# EAGLE board segmentring4 (EAGLE 7.2.0)
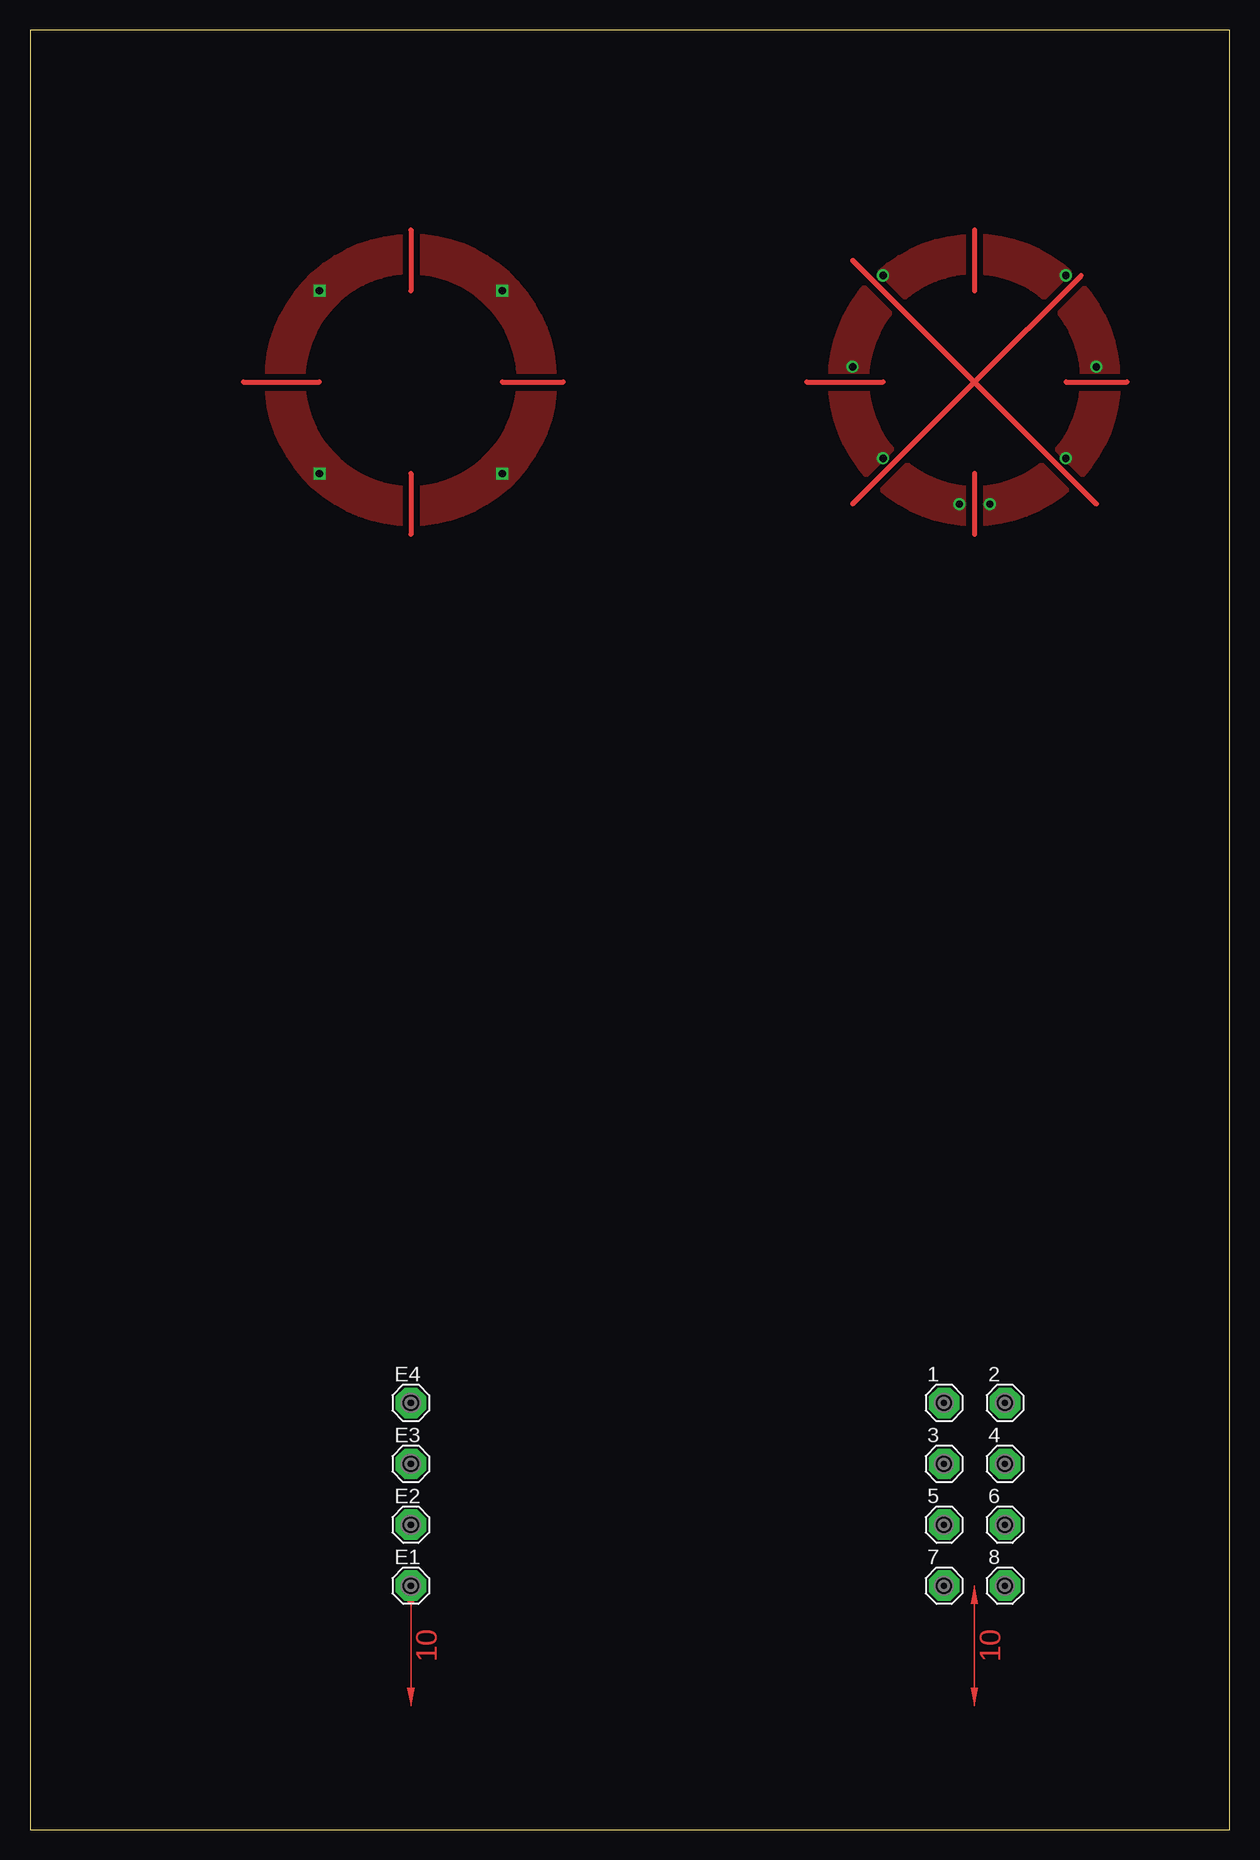
[diagram p0: board, top side]
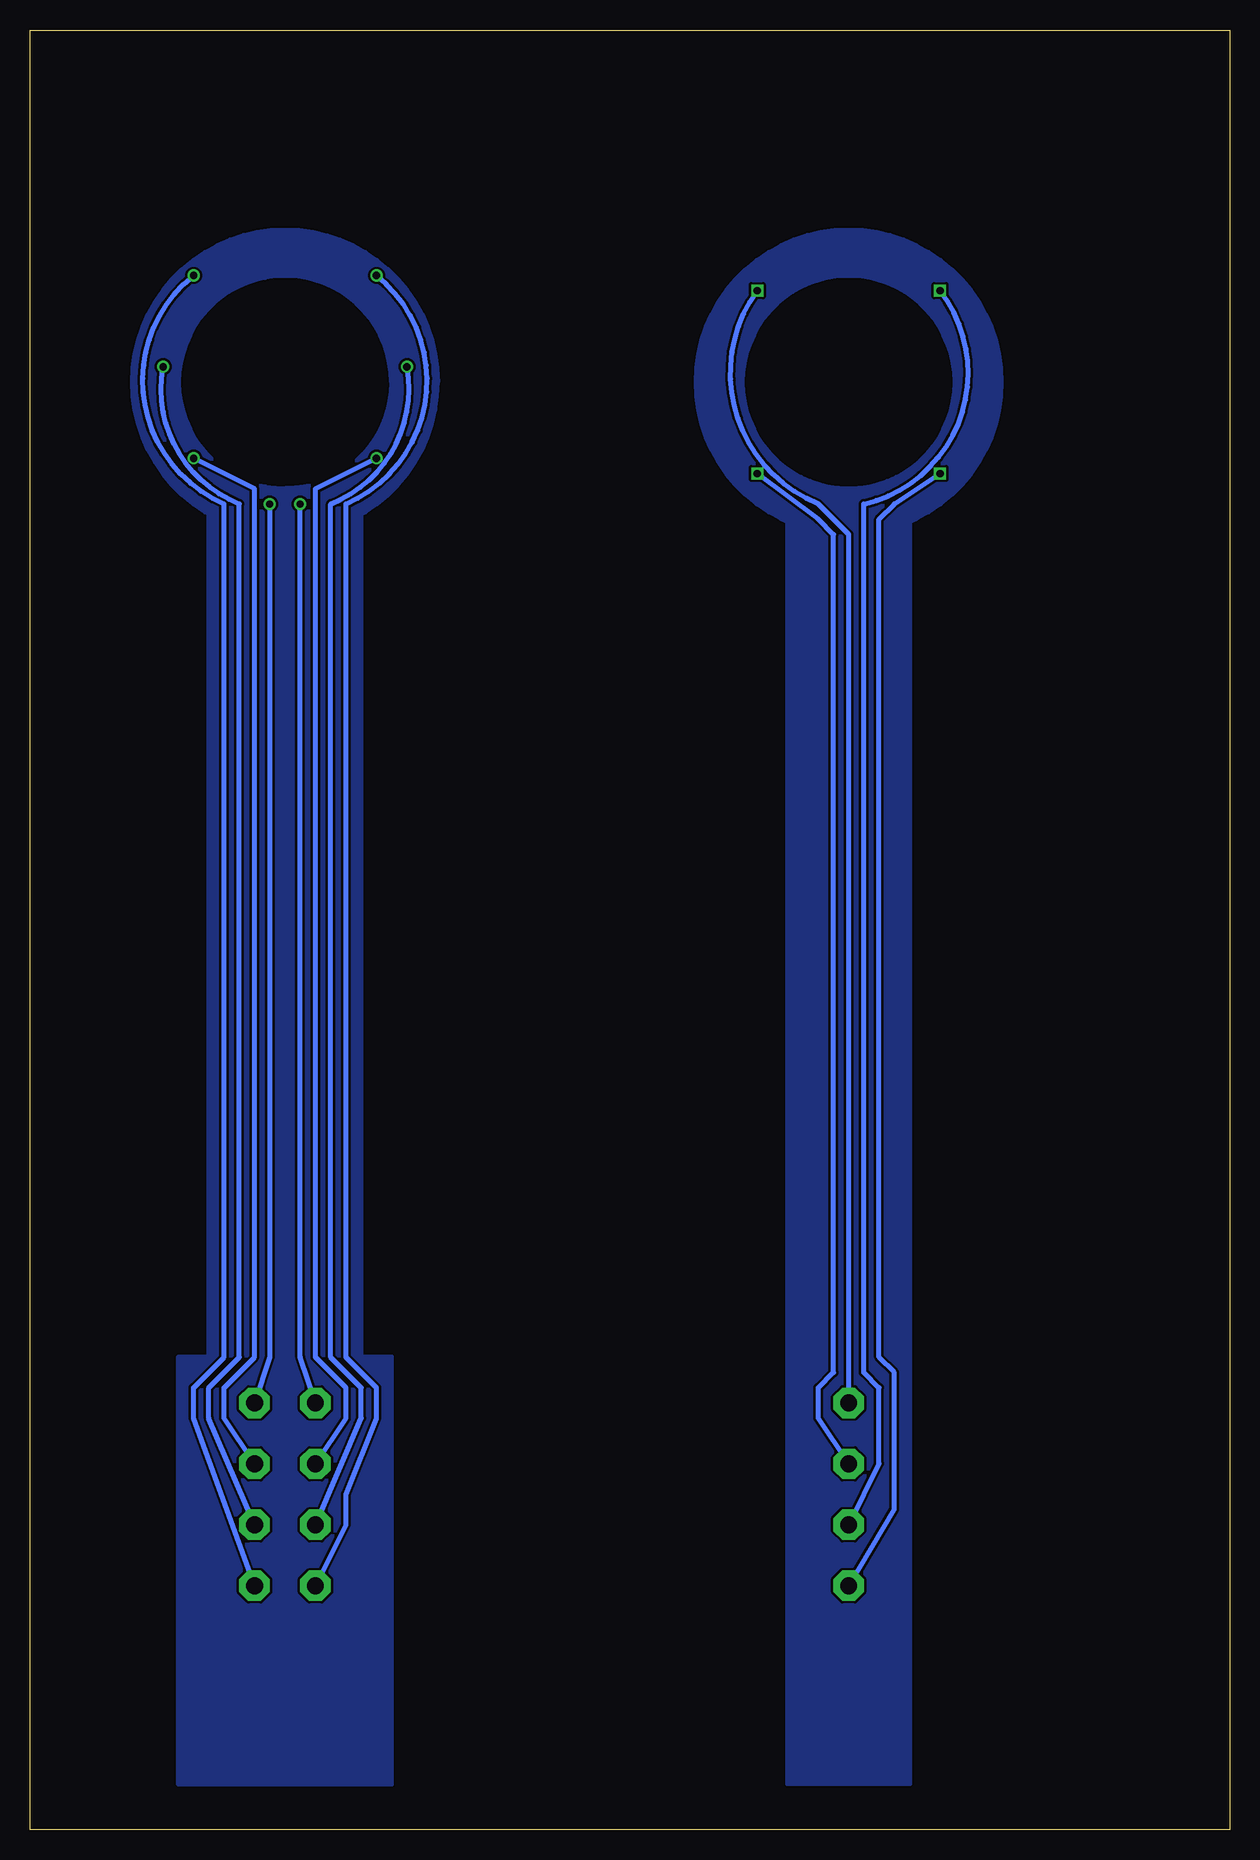
[diagram p1: board, bottom side, seen from below]

Size 100 x 150 mm. Coordinates in mm from the lower left corner, seen from the top.
Outline: 0,0 100,0 100,150 0,150 0,0
Copper layers (1*16): Top 0.035mm / dielectric 1.5mm / Bottom 0.035mm
Design rules "default": minimum track width 10mil, minimum drill 24mil, track to track 8mil, track to pad 8mil, pad to pad 8mil, via to via 8mil, smd to smd 8mil, copper to edge 40mil, drill to drill 8mil, minimum pad ring 10mil, minimum via ring 8mil, stop-mask expansion 4mil, vias tented up to drill 0mil, thermal gap 10mil

## Footprints (pad centres in the part's own frame; a part is rotated, then mirrored left to right if it is on the bottom)
SE14 = drill 1.397 pad 2.54 octagon: MP 0,0

## Placement (x,y rotation side)
1  SE14  [SE14]  76.2,35.56 0 top
2  SE14  [SE14]  81.28,35.56 0 top
3  SE14  [SE14]  76.2,30.48 0 top
4  SE14  [SE14]  81.28,30.48 0 top
5  SE14  [SE14]  76.2,25.4 0 top
6  SE14  [SE14]  81.28,25.4 0 top
7  SE14  [SE14]  76.2,20.32 0 top
8  SE14  [SE14]  81.28,20.32 0 top
E1  SE14  [SE14]  31.75,20.32 0 top
E2  SE14  [SE14]  31.75,25.4 0 top
E3  SE14  [SE14]  31.75,30.48 0 top
E4  SE14  [SE14]  31.75,35.56 0 top

## Library data of the parts
1-8 E1-E4 = solpad

## Nets
1: 1.MP
2: 2.MP
3: 3.MP
4: 4.MP
5: 5.MP
6: 6.MP
7: 7.MP
8: 8.MP
E1: E1.MP
E2: E2.MP
E3: E3.MP
E4: E4.MP

## Tracks (layer width: path | path; a pad name or v marks a point on that pad's centre or on a via)
1  (via drill 0.6)
  Bottom 0.406: 1.MP 77.47,39.37 v77.47,110.49
  pour Top (isolate 0.5): 69.74,120.82 arc90 78.74,111.82 78.74,108.82 arc-90 66.74,120.82
2  (via drill 0.6)
  Bottom 0.406: v80.01,110.49 80.01,39.37 2.MP
  pour Top (isolate 0.5): 78.74,111.82 arc90 87.74,120.82 90.74,120.82 arc-90 78.74,108.82
3  (via drill 0.6)
  Bottom 0.406: 3.MP 73.66,34.29 73.66,36.83 76.2,39.37 76.2,111.76 v71.12,114.3
  pour Top (isolate 0.5): 69.74,120.82 arc90 78.74,111.82 78.74,108.82 arc-90 66.74,120.82
4  (via drill 0.6)
  Bottom 0.406: 4.MP 83.82,34.29 83.82,36.83 81.28,39.37 81.28,111.76 v86.36,114.3
  pour Top (isolate 0.5): 78.74,111.82 arc90 87.74,120.82 90.74,120.82 arc-90 78.74,108.82
5  (via drill 0.6)
  Bottom 0.406: 5.MP 72.39,34.29 72.39,36.83 74.93,39.37 74.93,110.49 arc-79 v68.58,121.92
  pour Top (isolate 0.5): 78.74,129.82 arc90 69.74,120.82 66.74,120.82 arc-90 78.74,132.82
6  (via drill 0.6)
  Bottom 0.406: 6.MP 85.09,34.29 85.09,36.83 82.55,39.37 82.55,110.49 arc79 v88.9,121.92
  pour Top (isolate 0.5): 78.74,129.82 arc-90 87.74,120.82 90.74,120.82 arc90 78.74,132.82
7  (via drill 0.6)
  Bottom 0.406: 7.MP 73.66,25.4 73.66,27.94 71.12,34.29 71.12,36.83 73.66,39.37 73.66,110.49 arc-118 v71.12,129.54
  pour Top (isolate 0.5): 78.74,129.82 arc90 69.74,120.82 66.74,120.82 arc-90 78.74,132.82
8  (via drill 0.6)
  Bottom 0.406: 8.MP 86.36,34.29 86.36,36.83 83.82,39.37 83.82,110.49 arc118 v86.36,129.54
  pour Top (isolate 0.5): 78.74,129.82 arc-90 87.74,120.82 90.74,120.82 arc90 78.74,132.82
BULL
  Top 0.406: 64.77,120.65 71.12,120.65
E1  (via drill 0.6)
  Bottom 0.406: E1.MP 27.94,26.67 27.94,38.1 29.21,39.37 29.21,109.22 27.94,110.49 v24.13,113.03
  pour Top (isolate 0.5): 22.75,120.82 arc90 31.75,111.82 31.75,108.82 arc-90 19.75,120.82
E2  (via drill 0.6)
  Bottom 0.406: E2.MP 29.21,30.48 29.21,36.83 30.48,38.1 30.48,110.49 arc-115 v24.13,128.27
  pour Top (isolate 0.5): 31.75,129.82 arc90 22.75,120.82 19.75,120.82 arc-90 31.75,132.82
E3  (via drill 0.6)
  Bottom 0.406: E3.MP 34.29,34.29 34.29,36.83 33.02,38.1 33.02,107.95 34.29,109.22 v39.37,113.03
  pour Top (isolate 0.5): 31.75,111.82 arc90 40.75,120.82 43.75,120.82 arc-90 31.75,108.82
E4  (via drill 0.6)
  Bottom 0.406: E4.MP 31.75,107.95 34.29,110.49 arc104 v39.37,128.27
  pour Top (isolate 0.5): 31.75,129.82 arc-90 40.75,120.82 43.75,120.82 arc90 31.75,132.82
GND
  pour Bottom: 26.67,33.02 26.67,3.81 36.83,3.81 36.83,36.83 36.83,77.47 36.83,109.22 26.67,109.22
  pour Bottom: 31.75,111.76 arc-90 22.86,120.65 19.05,120.65 arc90 31.75,107.95
  pour Bottom: 22.86,120.65 arc-90 31.75,129.54 arc-90 40.64,120.65 arc-90 31.75,111.76 31.75,107.95 arc90 44.45,120.65 arc90 31.75,133.35 arc90 19.05,120.65
  pour Bottom: 78.74,111.76 78.74,107.95 arc90 91.44,120.65 arc90 78.74,133.35 arc90 66.04,120.65 69.85,120.65 arc-90 78.74,129.54 arc-90 87.63,120.65 arc-90
  pour Bottom: 66.04,120.65 69.85,120.65 arc90 78.74,111.76 78.74,107.95 arc-90
  pour Bottom: 72.39,110.49 85.09,110.49 85.09,39.37 87.63,39.37 87.63,3.81 69.85,3.81 69.85,39.37 72.39,39.37
LOCH
  Top 0.406: 78.74,120.65 68.58,130.81 | 78.74,120.65 88.9,110.49 | 78.74,120.65 87.63,129.54 | 78.74,120.65 68.58,110.49
N$9
  Top 0.406: 78.74,113.03 78.74,107.95
S$2
  Top 0.406: 17.78,120.65 24.13,120.65
S$3
  Top 0.406: 39.37,120.65 44.45,120.65
S$4
  Top 0.406: 31.75,133.35 31.75,128.27
S$5
  Top 0.406: 31.75,113.03 31.75,107.95
S$6
  Top 0.406: 86.36,120.65 91.44,120.65
S$7
  Top 0.406: 78.74,133.35 78.74,128.27
(copper drawn outside any net)
  shapes: Top area x2